# Altium PCB wacky-racer-car.PcbDoc (part 1 of 2)
Units mm, origin at the board's own origin, x right, y up, seen from the top; angles counter-clockwise.
Board outline 64 x 85 mm, 4 copper layers (Top Side, Ground Plane, Power Plane, Bottom Side), stack 0.844 mm thick; 102 components, 80 nets, 319 pads, 127 vias.
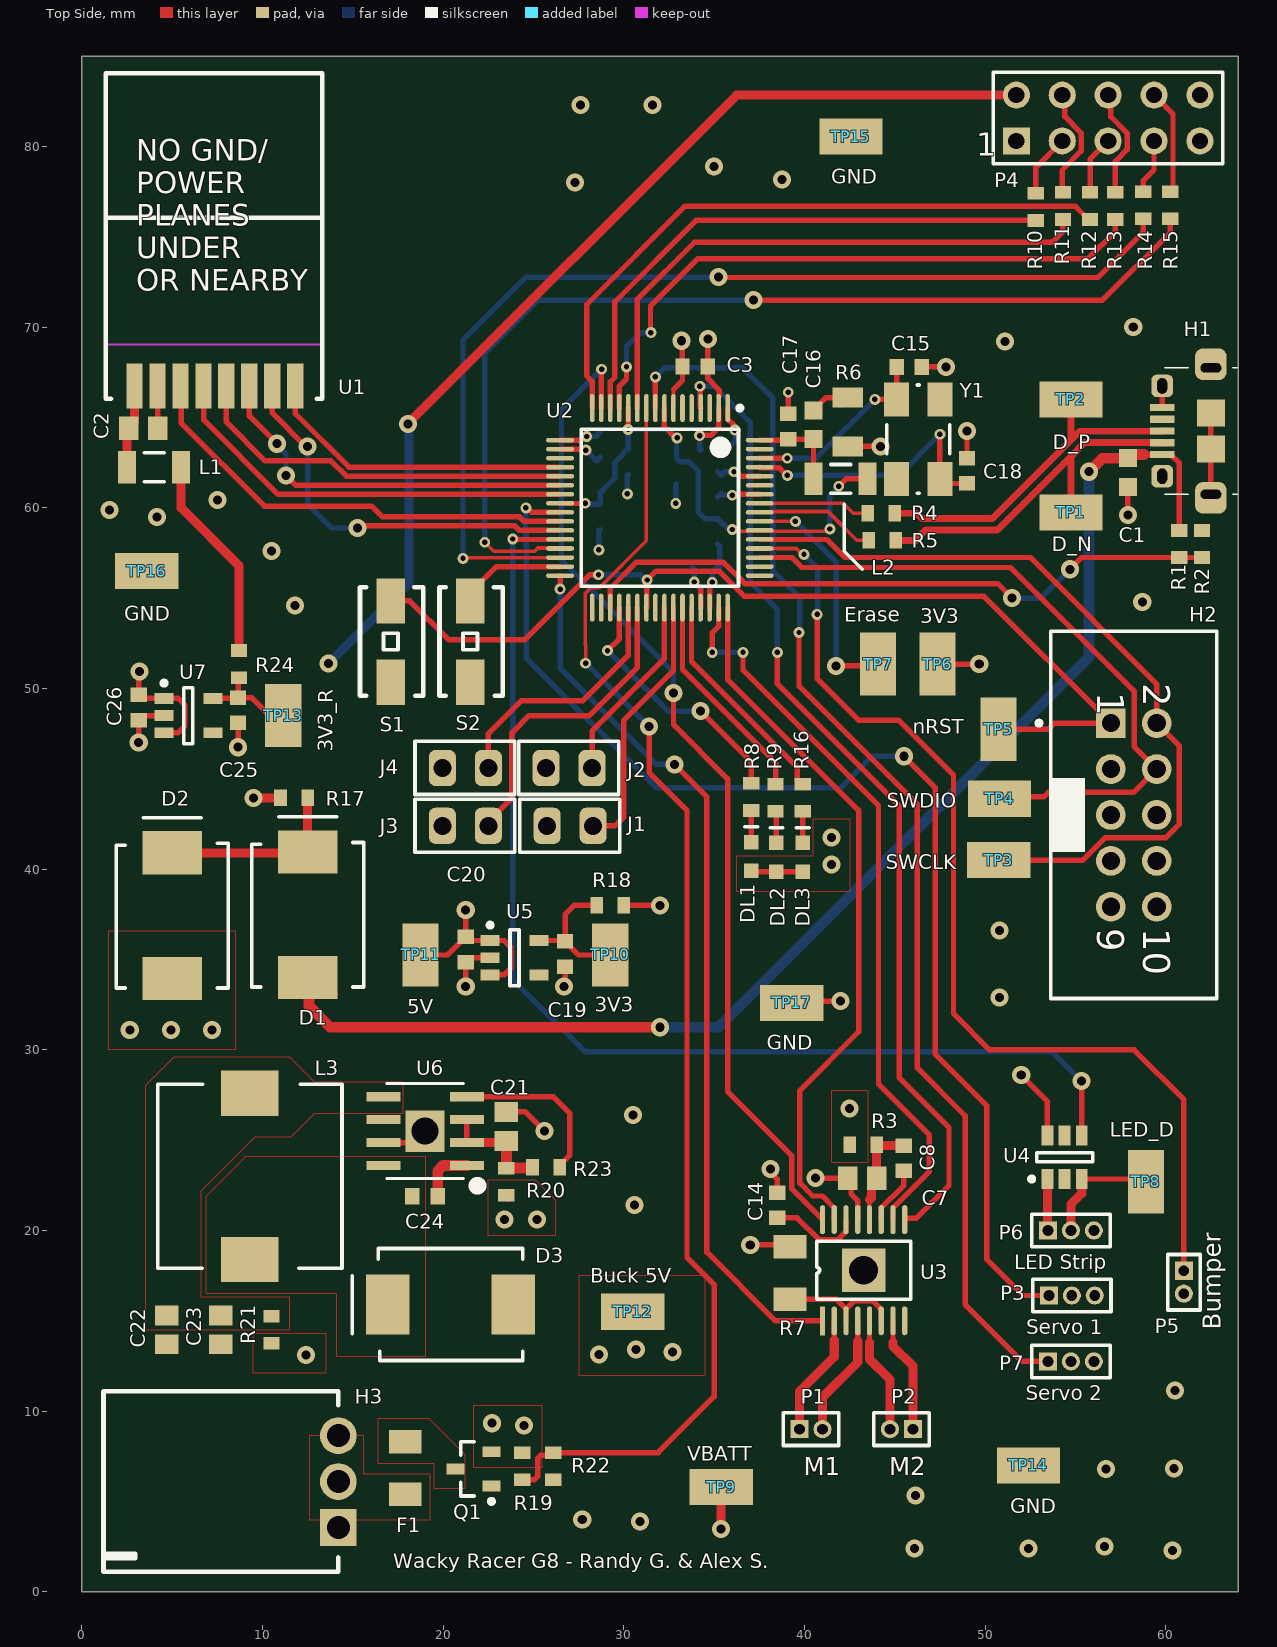
[diagram p0: Top Side view]
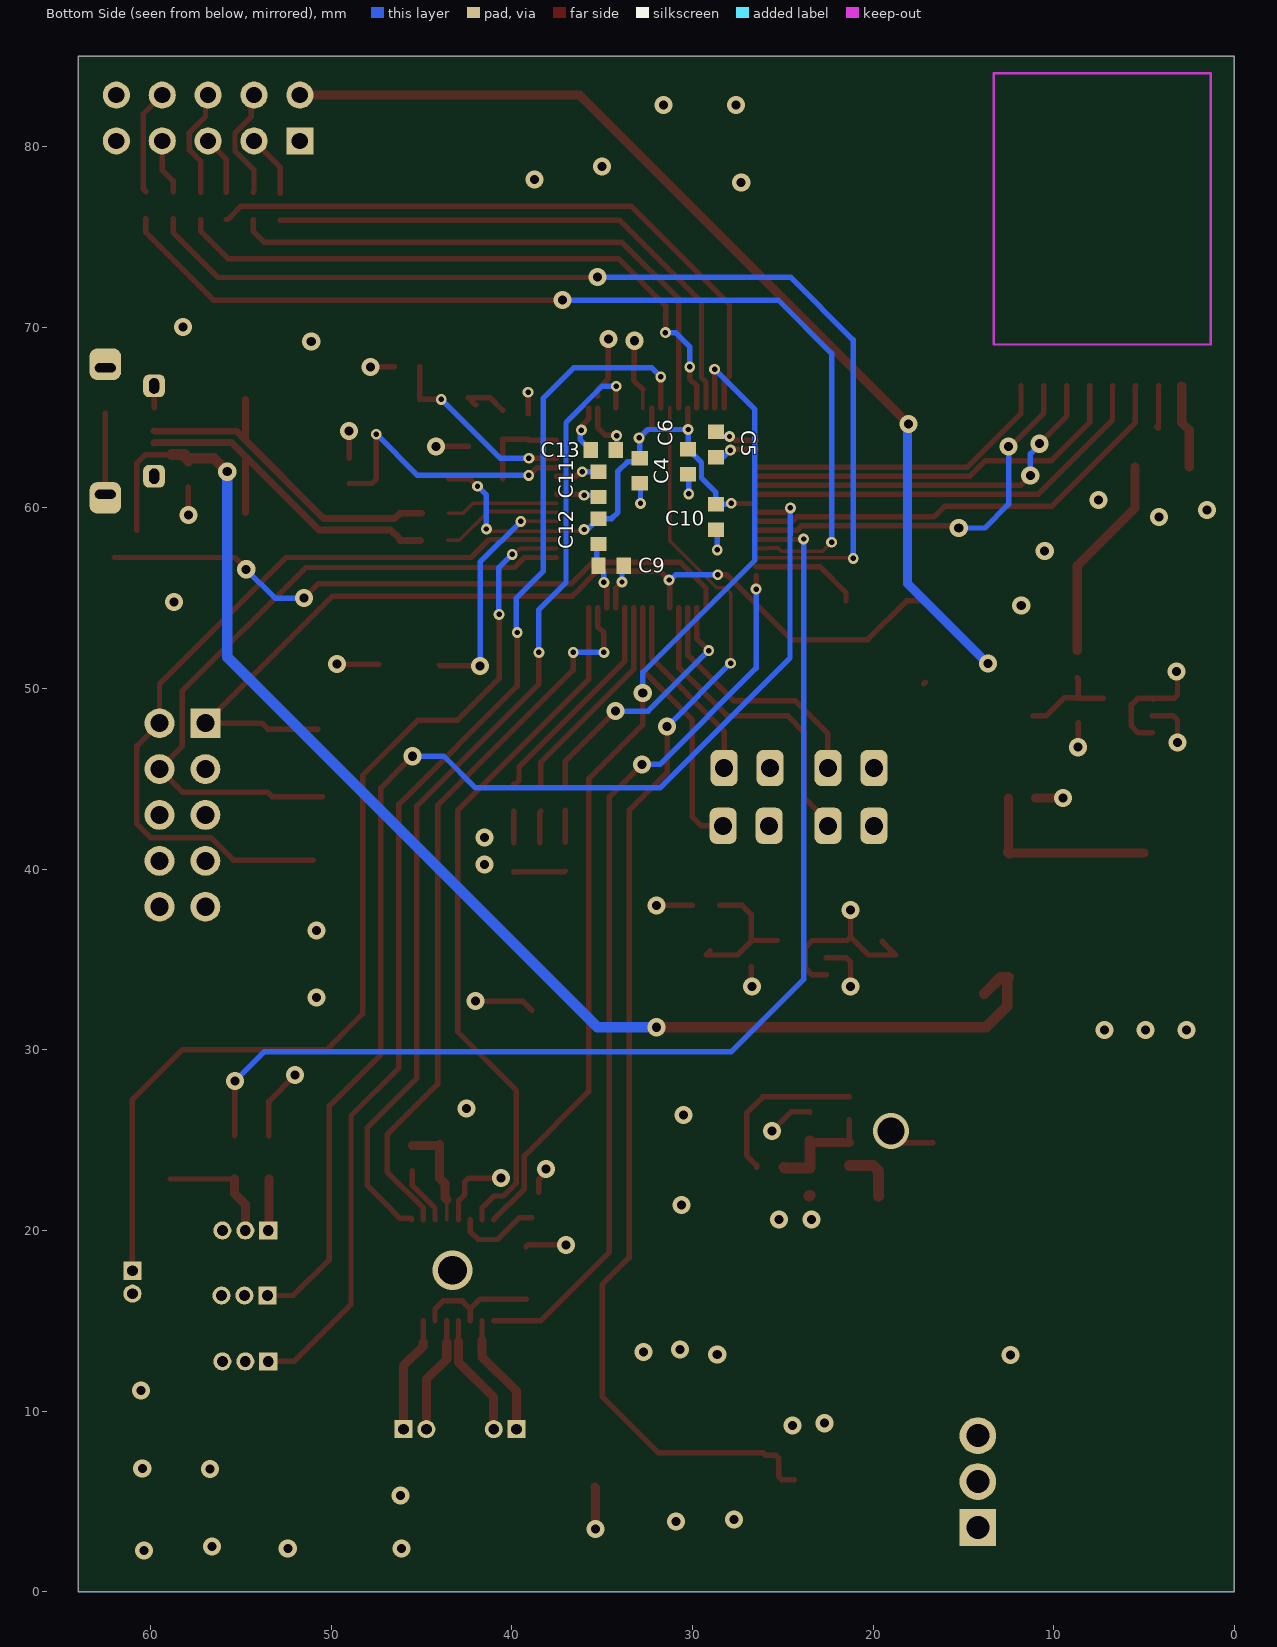
[diagram p1: Bottom Side view, seen from below]
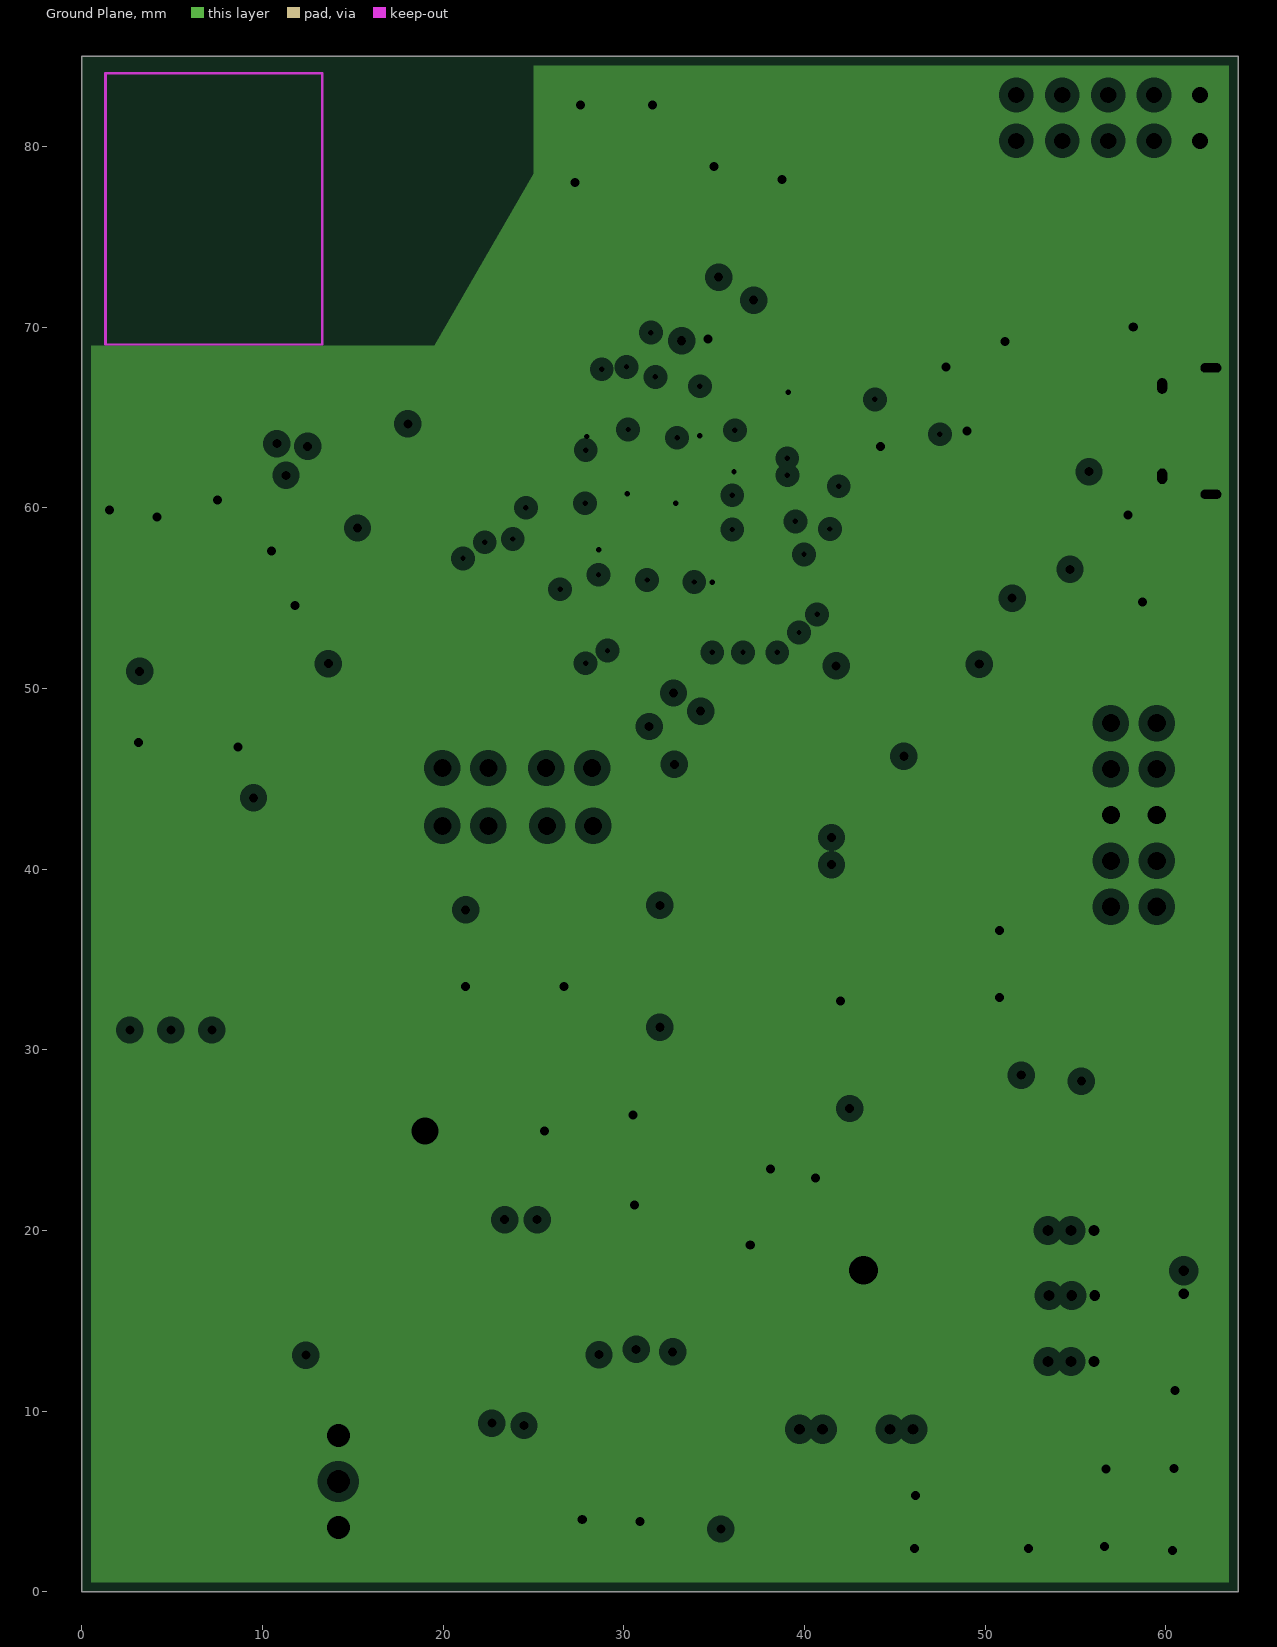
[diagram p2: Ground Plane, clearances drawn from the general rule]
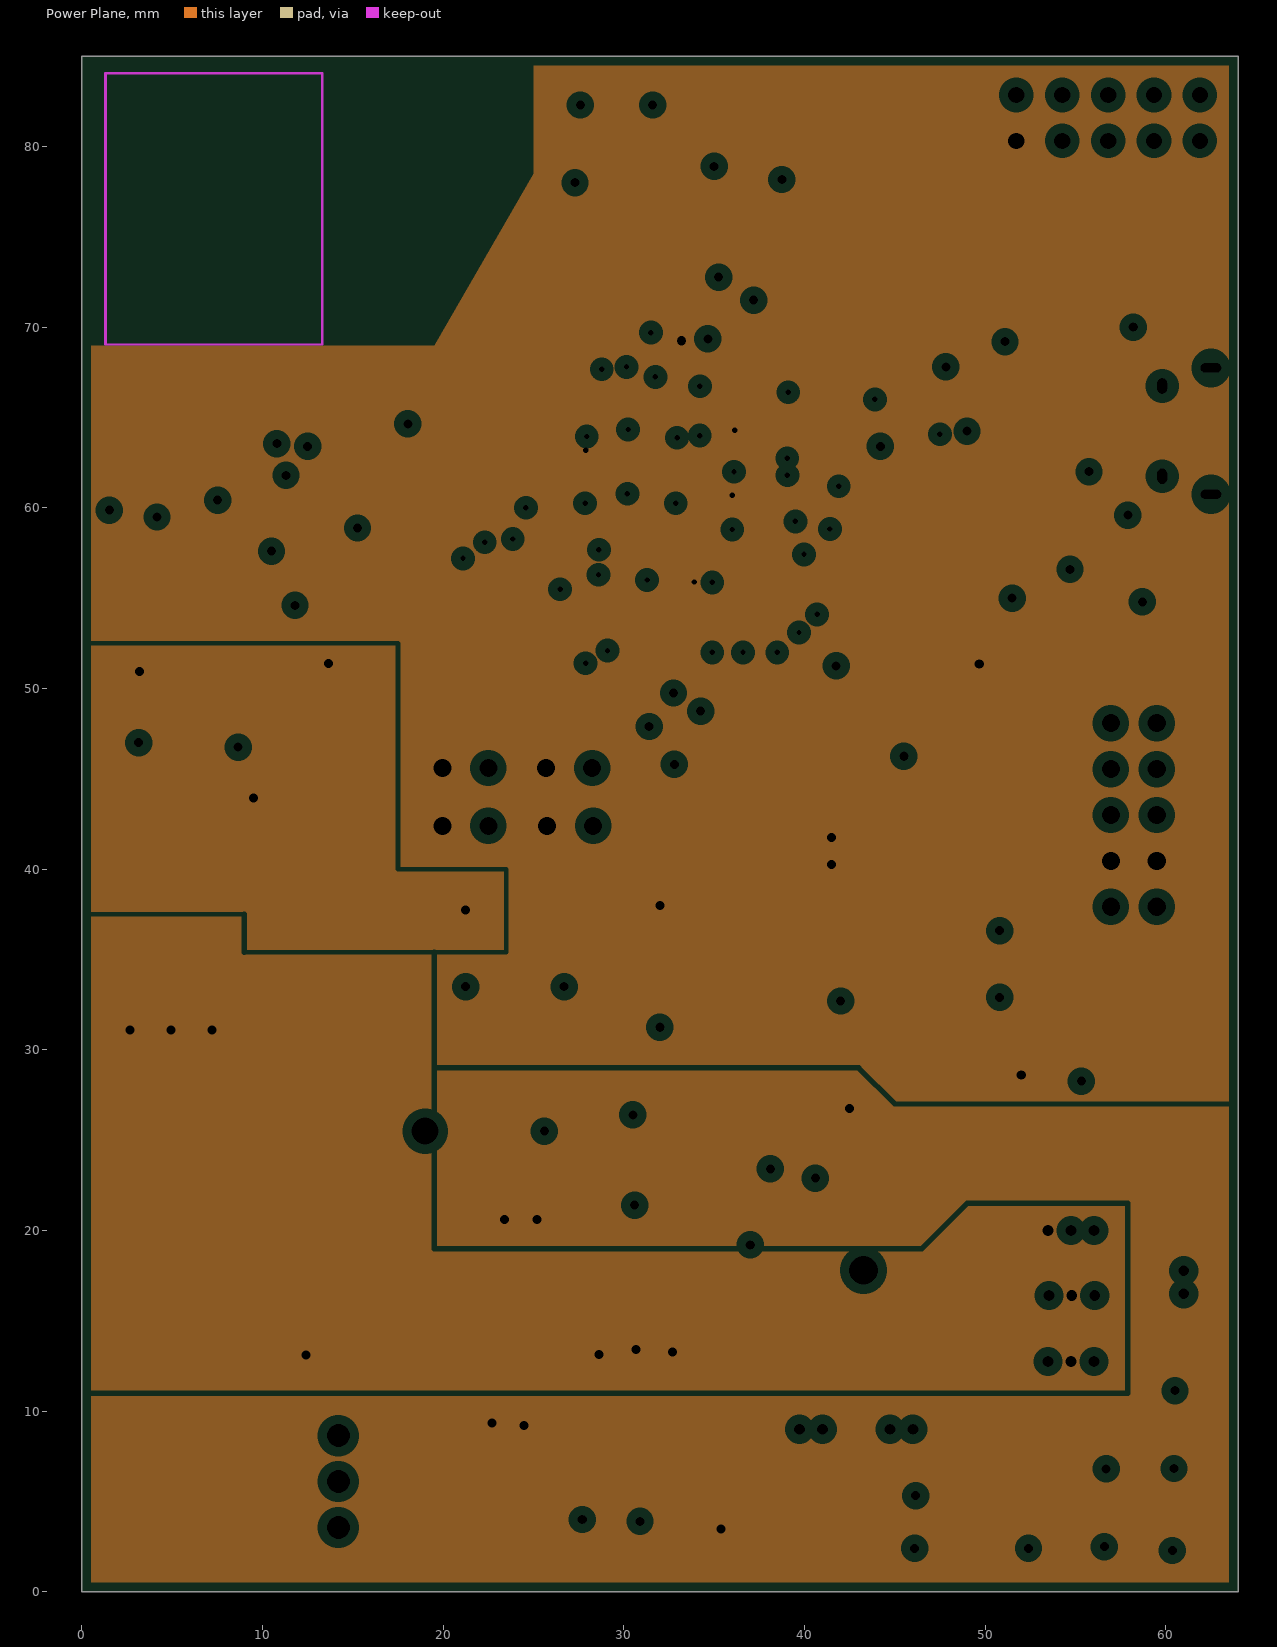
[diagram p3: Power Plane, clearances drawn from the general rule]

## Layer stack, top to bottom
Top Solder: solder mask 0.0102, Solder Resist, Dk 3.5
Top Side: signal copper 0.0356
Dielectric 1: core 0.32, FR-4, Dk 4.8
Ground Plane: plane copper 0.036, net GND
Dielectric 3: prepreg 0.127, Dk 4.2
Power Plane: plane copper 0.036, net (Multiple Nets)
Dielectric 4: core 0.254, Dk 4.2
Bottom Side: signal copper 0.0356
Bottom Solder: solder mask 0.0102, Solder Resist, Dk 3.5

## Board outline
0,85 64,85 64,0 0,0 0,85

## Design rules (kind name [scope] priority, off if disabled: settings)
BoardOutlineClearance [All] p1: gap=0.5 ignorepadtopadclearanceinfootprint=FALSE
Clearance Min_Clearance_Circuit_Labs [All] p1: gap=0.15 ignorepadtopadclearanceinfootprint=FALSE except(0: Arc-Hole Track-Hole SMDPad-Hole THPad-Hole Via-Hole Fill-Hole Poly-Hole Region-Hole Text-Hole)
DiffPairsRouting [All] p1: maxlimit=0.254 minlimit=0.254 mostfreqgap=0.254 toplayer_minwidth=0.381 toplayer_maxwidth=0.381 toplayer_prefwidth=0.381 bottomlayer_minwidth=0.381 bottomlayer_maxwidth=0.381 bottomlayer_prefwidth=0.381 maxuncoupledlength=12.7
FanoutControl Fanout_BGA [IsBGA] p1 off: bgadir=Out bgaviamode=Centered fanoutstyle=Auto fanoutdirection=Alternating viagrid=0.025 // Fanout_BGA (Default Rule)
HoleSize [All] p1: absolutevalues=TRUE maxlimit=10 minlimit=0.3 maxpercent=80.000 minpercent=20.000
MinimumAnnularRing [All] p1: minimumring=0.1
MinimumSolderMaskSliver [All] p1: minsoldermaskwidth=0.1
NetAntennae [All] p1: netantennaetolerance=1
PasteMaskExpansion [All] p1 off: expansion=0.2
PlaneClearance [All] p1: clearance=0.508
PlaneConnect [All] p1: planeconnectstyle=Relief reliefexpansion=0.508 reliefentries=4 reliefconductorwidth=0.254 reliefairgap=0.254
PolygonConnect [All] p1: connectstyle=Relief reliefconductorwidth=0.254 reliefentries=4 polygonreliefangle="90 Angle" airgapwidth=0.254
RoutingVias [All] p1: holewidth=0.5 width=1 viastyle="Through Hole" minholewidth=0.3 minwidth=0.6 maxholewidth=1 maxwidth=2
SMDNeckDown [All] p1 off: percent=50.000
SMDToCorner [All] p1: distance=98425
SMDToPlane [All] p1: distance=1968504
SilkToSolderMaskClearance SilkscreenOverComponentPads [IsPad] p1: minsilkscreentomaskgap=0.254 clearancetoexposedcopper=TRUE
SolderMaskExpansion [All] p1: expansion=0.102
ViasUnderSMD [All] p1: allowed=FALSE
Width [All] p1: maxlimit=2 minlimit=0.15 preferedwidth=0.3
21 further rules are at their usual default settings.

## Classes and differential pairs
component class "Power Management": C19 C20 C21 C22 C23 C24 C25 C26 D1 D2 D3 F1 H3 L3 Q1 R17 R18 R19 R20 R21 R22 R23 R24 TP9 TP10 TP11 TP12 TP13 TP14 TP15 TP16 TP17 U5 U6 U7
component class MCU: C1 C2 C3 C4 C5 C6 C7 C8 C9 C10 C11 C12 C13 C14 C15 C16 C17 C18 DL1 DL2 DL3 H1 H2 J1 J2 J3 J4 L1 L2 P1 P2 P3 P4 P5 P6 P7 R1 R2 R3 R4 R5 R6 R7 R8 R9 R10 R11 R12 R13 R14 R15 R16 S1 S2 TP1 TP2 TP3 TP4 TP5 TP6 TP7 TP8 U1 U2 U3 U4 Y1
differential pair D: +D_P -D_N

## Components (designator, comment, footprint, x,y, rotation, side; value= is the part's Value field where it differs from the comment)
C1 "4.7uF" CAPC1608N 57.9,61.95 r90 top
C2 "10uF" CAPC2012L 3.4,64.4 r180 top
C3 "100nF" CAPC1608L 33.95,67.825 r180 top
C4 "100nF" CAPC1608L 32.919,62.05 r270 bottom
C5 "100nF" CAPC1608L 28.7,63.5 r270 bottom
C6 "100nF" CAPC1608L 30.25,62.55 r270 bottom
C7 "10uF" CAPC2012L 43.2,22.9 r0 top
C8 "10nF" CAPC1608L 45.5,24 r90 top
C9 "100nF" CAPC1608L 34.5,56.8 r180 bottom
C10 "100nF" CAPC1608L 28.7,59.5 r270 bottom
C11 "100nF" CAPC1608L 35.2,61.3 r270 bottom
C12 "100nF" CAPC1608L 35.2,58.7 r270 bottom
C13 "100nF" CAPC1608L 34.933,63.196 r0 bottom
C14 "2.2uF" CAPC1608L 38.5,21.4 r90 top
C15 "27pF" CAPC1608L 45.8,67.8 r180 top
C16 "4.7uF" CAPC1608N 40.5,64.6 r270 top
C17 "100nF" CAPC1608L 39.1,64.5 r270 top
C18 "27pF" CAPC1608L 49,62.05 r270 top
C19 "1uF" CAPC1608L 26.75,35.3 r90 top
C20 "1uF" CAPC1608L 21.25,35.55 r90 top
C21 "10uF" CAPC2012L 23.5,25.75 r270 top
C22 "33uF" CAPC2012L 4.7,14.5 r90 top
C23 "33uF" CAPC2012L 7.7,14.5 r90 top
C24 "100nF" CAPC1608L 19,21.9 r180 top
C25 "1uF" CAPC1608L 8.65,48.8 r90 top
C26 "1uF" CAPC1608L 3.15,48.95 r90 top
D1 "VS-30BQ015-M3/9AT" SMC 12.5,37.475 r90 top
D2 "VS-30BQ015-M3/9AT" SMC 5,37.425 r90 top
D3 "VS-30BQ015-M3/9AT" SMC 20.4,15.9 r180 top
DL1 "Yellow" WL-SMCW0603 37.05,41.5 r270 top
DL2 "Blue" WL-SMCW0603 38.45,41.45 r270 top
DL3 "Red" WL-SMCW0603 39.9,41.45 r270 top
F1 "5A" RESC3216N 17.904,6.846 r90 top
H1 "JS_USB_MICRO_B" FCI_USB_10118194-0001LF 63.95,64.25 r90 top
H2 "Header 5X2 Vert" IDC2.54-V10D 58.23,43 r270 top
H3 "Battery In" BATT_HEADER_3POS 14.2,6.1 r90 top
J1 "100Mil Jumper" JMP2.54 28.3,42.4 r180 top
J2 "100Mil Jumper" JMP2.54 28.244,45.6 r180 top
J3 "100Mil Jumper" JMP2.54 22.5,42.4 r180 top
J4 "100Mil Jumper" JMP2.54 22.5,45.6 r180 top
L1 "1A max, Idc 0.3R," INDC3216L 4,62.25 r0 top
L2 "1A max, Idc 0.3R," INDC3216L 42,61.6 r0 top
L3 "IND 5.2UH 6A" INDUCTOR5u2 9.3,23 r90 top
P1 "Motor 1" MHDR1X2 39.73,9 r0 top
P2 "Motor 2" MHDR1X2 46,9 r180 top
P3 "Servo 1" MHDR1X3 53.53,16.4 r0 top
P4 "Header 5X2" HDR2X5 51.73,80.31 r0 top
P5 "Bumper" MHDR1X2 61,17.77 r270 top
P6 "LED Strip" MHDR1X3 53.48,20 r0 top
P7 "Servo 2" MHDR1X3 53.48,12.75 r0 top
Q1 "SSM3J328R,LF" SOT23_L 21.673,6.804 r180 top
R1 "27K" RESC1608L 60.75,58 r90 top
R2 "47K" RESC1608L 62,58 r270 top
R3 "0R" RESC1608L 43.25,24.75 r0 top
R4 "27R" RESC1608L 44.25,59.7 r180 top
R5 "27R" RESC1608L 44.3,58.2 r180 top
R6 "1R" RESC3216L 42.4,64.75 r90 top
R7 "25mR" RESC3216N 39.2,17.65 r270 top
R8 "1K" RESC1608L 37.05,44 r270 top
R9 "100R" RESC1608L 38.4,43.95 r270 top
R10 "750R" RESC1608L 52.81,76.66 r90 top
R11 "750R" RESC1608L 54.31,76.71 r270 top
R12 "750R" RESC1608L 55.81,76.71 r90 top
R13 "750R" RESC1608L 57.21,76.71 r270 top
R14 "750R" RESC1608L 58.75,76.75 r90 top
R15 "750R" RESC1608L 60.25,76.75 r270 top
R16 "1K" RESC1608L 39.9,43.95 r270 top
R17 "0R" RESC1608L 11.75,43.95 r0 top
R18 "0R" RESC1608L 29.25,38 r180 top
R19 "82K" RESC1608L 24.373,6.954 r90 top
R20 "0R" RESC1608L 23.5,22.7 r270 top
R21 "0R" RESC1608L 10.5,14.5 r90 top
R22 "47K" RESC1608L 26.1,6.95 r90 top
R23 "100K" RESC1608L 25.7,23.5 r0 top
R24 "0R" RESC1608L 8.7,51.35 r270 top
S1 "EVQPNF05M" EVQPNF05M 17.1,52.6 r270 top
S2 "EVQPNF05M" EVQPNF05M 21.5,52.6 r270 top
TP1 "D_N" TP_1206 54.75,59.75 r180 top value=TP
TP2 "D_P" TP_1206 54.75,66 r0 top value=TP
TP3 "SWCLK" TP_1206 50.75,40.5 r0 top value=TP
TP4 "SWDIO" TP_1206 50.8,43.9 r0 top value=TP
TP5 "nRST" TP_1206 50.75,47.75 r270 top value=TP
TP6 "3V3" TP_1206 47.375,51.35 r90 top value=TP
TP7 "Erase" TP_1206 44.075,51.35 r90 top value=TP
TP8 "LED_D" TP_1206 58.9,22.7 r90 top value=TP
TP9 "VBATT" TP_1206 35.4,5.8 r0 top value=TP
TP10 "3V3" TP_1206 29.25,35.25 r90 top value=TP
TP11 "5V" TP_1206 18.75,35.25 r90 top value=TP
TP12 "Buck 5V" TP_1206 30.5,15.5 r0 top value=TP
TP13 "3V3_R" TP_1206 11.15,48.5 r90 top value=TP
TP14 "GND" TP_1206 52.4,7 r0 top value=TP
TP15 "GND" TP_1206 42.575,80.55 r180 top value=TP
TP16 "GND" TP_1206 3.6,56.5 r0 top value=TP
TP17 "GND" TP_1206 39.3,32.6 r180 top value=TP
U1 "nRF24 SMD" NRF24 1.314,66.05 r0 top
U2 "ATSAM4S8BA-ANR" LQFP64_L 32,60 r270 top locked
U3 "DRV8833" HTSOP16 41,15 r90 top locked
U4 "SN74LVC1T45" SOT23-6_N 54.4,24.05 r90 top
U5 "CAT6219-330TDGT3" SOT95P280X145-5N 23.95,35.1 r0 top
U6 "ADP2302ARDZ-5.0 BUCK" RD_8_1 19,25.5 r180 top locked value=Value
U7 "CAT6219-330TDGT3" SOT95P280X145-5N 5.9,48.5 r0 top
Y1 "12MHz" 6.0X3.5-4 46.3,63.8 r90 top

## Footprints (in the part's own frame and the unit in brackets; to place one, negate y for a bottom-side part, rotate by r counter-clockwise, add the part's x,y. Pads: shape width x height; smd on the part's side, far side on the other; paste and mask are expansions set on the pad)
6.0X3.5-4 [mm] "4 SMD 6.0X3.5 mm No Lead Crystal"
  rect 1.9x1.4 smd: 1(-2.2,-1.2) 2(2.2,-1.2) 3(2.2,1.2) 4(-2.2,1.2)
  silkscreen extent -3,-1.75 3,1.75, body extent -3,-1.75 3,1.75, height 1.2
BATT_HEADER_3POS [mil]
  rect 80x80 hole 50: 1(-100,0)
  round 80 hole 50: 2(0,0) 3(100,0)
  silkscreen extent -197,0 197,512
CAPC1608L [mm] "Chip Capacitor, Body 1.6x0.8mm, IPC High Density"
  rect 0.8x0.9 smd: 1(-0.7,0) 2(0.7,0)
  body extent -0.87,-0.48 0.87,0.48, height 0.85
CAPC1608N [mm] "Chip Capacitor, Body 1.6x0.8mm, IPC Medium Density"
  rect 1x1 smd: 1(-0.8,0) 2(0.8,0)
  body extent -0.87,-0.48 0.87,0.48, height 0.85
CAPC2012L [mm] "Chip Capacitor, Body 2.0x1.3mm, IPC High Density"
  rect 1.1x1.3 smd: 1(-0.8,0) 2(0.8,0)
  body extent -1.1,-0.72 1.1,0.72, height 1.1
EVQPNF05M [mm] "Panansonic light touch SMD push button switch"
  rect 2.5x1.6 smd: 1(-2.25,0) 2(2.25,0)
  silkscreen extent -3,-1.7 3,1.8, body extent -3,-1.7 3,1.8, height 5
FCI_USB_10118194-0001LF [mm] "Micro USB B Type Receptacle"
  rect 0.4x1.35 smd mask+0.07: 1(-1.3,4.15) 2(-0.65,4.15) 3(0,4.15) 4(0.65,4.15) 5(1.3,4.15)
  rrect50% 1.75x1.75 hole 0.5 slot 1.15 at 90 deg copper offset -0.2,0 paste+0 mask+0.1: 6(-3.5,1.45)
  rrect50% 1.25x1.2 hole 0.55 slot 0.85 at 0 deg: 6(-2.5,4.15) 6(2.5,4.15)
  rect 1.5x1.55 smd: 6(-1,1.45) 6(1,1.45)
  rrect50% 1.75x1.75 hole 0.5 slot 1.15 at 90 deg copper offset 0.2,0 paste+0 mask+0.1: 6(3.5,1.45)
  silkscreen extent -3.5,0 3.5,4
HDR2X5 [mm] "Connector; Header; 5x2 Position"
  rect 1.5x1.5 hole 0.9: 1(0,0)
  round 1.5 hole 0.9: 2(0,2.54) 3(2.54,0) 4(2.54,2.54) 5(5.08,0) 6(5.08,2.54) 7(7.62,0) 8(7.62,2.54) 9(10.16,0) 10(10.16,2.54)
  silkscreen extent -1.27,-1.27 11.43,3.81
HTSOP16 [mm]
  rect 1.6x0.3 smd: 1(0,0)
  oval 1.6x0.3 smd: 2(0,-0.65) 3(0,-1.3) 4(0,-1.95) 5(0,-2.6) 6(0,-3.25) 7(0,-3.9) 8(0,-4.55) 9(5.6,-4.55) 10(5.6,-3.9) 11(5.6,-3.25) 12(5.6,-2.6) 13(5.6,-1.95) 14(5.6,-1.3) 15(5.6,-0.65) 16(5.6,0)
  rect 2.4x2.4 smd paste-0.5: 17(2.8,-2.275)
  silkscreen extent 1.2,-4.88 4.4,0.33
IDC2.54-V10D [mm] "Connector; IDC, Low Profile Male Header, Thru-Hole; 10 Position; Vertical; Pitch 2.54 mm; Body 20.32 x 9.2 x 9.45 mm (LxWxH)"
  rect 1.65x1.65 hole 1: 1(-5.08,-1.27)
  round 1.65 hole 1: 2(-5.08,1.27) 3(-2.54,-1.27) 4(-2.54,1.27) 5(0,-1.27) 6(0,1.27) 7(2.54,-1.27) 8(2.54,1.27) 9(5.08,-1.27) 10(5.08,1.27)
  silkscreen extent -10.16,-5.37 10.16,4.6, body extent -10.16,-4.6 10.16,4.6, height 9.45
INDC3216L [mm] "Chip Inductor, Body 3.2x1.6mm, IPC High Density"
  rect 1x1.8 smd: 1(-1.5,0) 2(1.5,0)
  silkscreen extent -0.55,-0.8 0.55,0.8, body extent -1.75,-0.95 1.75,0.95, height 1.9
INDUCTOR5u2 [mm]
  rect 2.5x3.2 smd: 1(-4.6,0) 2(4.6,0)
  silkscreen extent -5.1,-5.1 5.1,5.1
JMP2.54 [mm] "Jumper Change over 2.54mm"
  rrect50% 1.5x2 hole 1: 1(0,0) 2(2.544,0)
  silkscreen extent -1.47,-1.47 4.05,1.47, body extent -1.43,-1.43 4.05,1.43, height 8.45
LQFP64_L [mm] "Thin QFP, 64-Leads, Body 10x10mm, Pitch 0.5mm, IPC High Density"
  oval 1.55x0.25 smd mask+0.07: 1(-5.525,3.75) 2(-5.525,3.25) 3(-5.525,2.75) 4(-5.525,2.25) 5(-5.525,1.75) 6(-5.525,1.25) 7(-5.525,0.75) 8(-5.525,0.25) 9(-5.525,-0.25) 10(-5.525,-0.75) 11(-5.525,-1.25) 12(-5.525,-1.75) 13(-5.525,-2.25) 14(-5.525,-2.75) 15(-5.525,-3.25) 16(-5.525,-3.75) 33(5.525,-3.75) 34(5.525,-3.25) 35(5.525,-2.75) 36(5.525,-2.25) 37(5.525,-1.75) 38(5.525,-1.25) 39(5.525,-0.75) 40(5.525,-0.25) 41(5.525,0.25) 42(5.525,0.75) 43(5.525,1.25) 44(5.525,1.75) 45(5.525,2.25) 46(5.525,2.75) 47(5.525,3.25) 48(5.525,3.75)
  oval 0.25x1.55 smd mask+0.07: 17(-3.75,-5.525) 18(-3.25,-5.525) 19(-2.75,-5.525) 20(-2.25,-5.525) 21(-1.75,-5.525) 22(-1.25,-5.525) 23(-0.75,-5.525) 24(-0.25,-5.525) 25(0.25,-5.525) 26(0.75,-5.525) 27(1.25,-5.525) 28(1.75,-5.525) 29(2.25,-5.525) 30(2.75,-5.525) 31(3.25,-5.525) 32(3.75,-5.525) 49(3.75,5.525) 50(3.25,5.525) 51(2.75,5.525) 52(2.25,5.525) 53(1.75,5.525) 54(1.25,5.525) 55(0.75,5.525) 56(0.25,5.525) 57(-0.25,5.525) 58(-0.75,5.525) 59(-1.25,5.525) 60(-1.75,5.525) 61(-2.25,5.525) 62(-2.75,5.525) 63(-3.25,5.525) 64(-3.75,5.525)
  silkscreen extent -5.65,-4.35 4.35,4.55, body extent -5,-5 5,5, height 1.6
MHDR1X2 [mm] "Connector; Header; 2 Position"
  rect 1x1 hole 0.6: 1(0,0)
  round 1 hole 0.6: 2(1.27,0)
  silkscreen extent -0.9,-0.9 2.17,0.9
MHDR1X3 [mm] "Connector; Header; 3 Position"
  rect 1x1 hole 0.6: 1(0,0)
  round 1 hole 0.6: 2(1.27,0) 3(2.54,0)
  silkscreen extent -0.9,-0.9 3.44,0.9
NRF24 [mm]
  rect 0.9x2.5 smd: 1(1.6,0.7) 2(2.871,0.7) 3(4.143,0.7) 4(5.414,0.7) 5(6.686,0.7) 6(7.957,0.7) 7(9.229,0.7) 8(10.5,0.7)
  Keep-Out Layer lines w0.1: 0,3 12,3
  Keep-Out Layer lines w0.15: 0,3 0,18 12,18 12,3
  silkscreen extent 0,0 12,18
RD_8_1 [mil]
  rect 74x20 smd paste+0 mask+0: 1(-91,75) 2(-91,25) 3(-91,-25) 4(-91,-75) 5(91,-75) 6(91,-25) 7(91,25) 8(91,75)
  rect 84.65x90 smd paste-44.5 mask+0: EPAD(0,0)
  silkscreen extent -118,-104 84,123, body extent 0,0 10,10, height 10
RESC1608L [mm] "Chip Resistor, Body 1.6x0.8mm, IPC High Density"
  rect 0.7x0.9 smd: 1(-0.75,0) 2(0.75,0)
  body extent -0.85,-0.48 0.85,0.48, height 0.9
RESC3216L [mm] "Chip Resistor, Body 3.1x1.6mm, IPC High Density"
  rect 1.1x1.7 smd: 1(-1.35,0) 2(1.35,0)
  body extent -1.68,-0.87 1.68,0.87, height 2.54
RESC3216N [mm] "Chip Resistor, Body 3.2x1.6mm, IPC Medium Density"
  rect 1.3x1.8 smd: 1(-1.45,0) 2(1.45,0)
  body extent -1.68,-0.87 1.68,0.87, height 0.71
SMC [mm] "DO-214-AB/SMC; 2 C-Bend Leads; Body 7.9 x 5.9 mm, inc. leads (LxW)"
  rect 2.4x3.3 smd: 1(-3.475,0) 2(3.475,0)
  silkscreen extent -4,-3.1 5.43,3.1
SOT23-6_N [mm]
  rect 1.1x0.65 smd: 1(-1.2,0.95) 2(-1.2,0) 3(-1.2,-0.95) 4(1.2,-0.95) 5(1.2,0) 6(1.2,0.95)
  silkscreen extent -1.32,-1.55 0.25,1.95, body extent -0.9,-1.55 0.9,1.55, height 1.45
SOT23_L [mm] "SOT23, 3-Leads, Body 2.9x1.3mm, Pitch 0.95mm, Lead Span 2.3mm, IPC High Density"
  rect 1x0.6 smd: 1(-1,0.95) 2(-1,-0.95) 3(1,0)
  silkscreen extent -1.13,-1.5 0.7,1.92, body extent -0.7,-1.5 0.7,1.5, height 1.1
SOT95P280X145-5N [mm] "SOT23, 5-Leads, Body 2.90x2.80mm, Pitch 0.95mm, IPC Medium Density"
  rect 1.05x0.6 smd: 1(-1.35,0.95) 2(-1.35,0) 3(-1.35,-0.95) 4(1.35,-0.95) 5(1.35,0.95)
  silkscreen extent -1.47,-1.55 0.25,1.92, body extent -0.87,-1.52 0.87,1.53, height 1.45
TP_1206 [mm] "Test Point Pad"
  rect 3.5x2 smd: 1(0,0)
  body extent -1.62,-0.85 1.63,0.8, height 2
WL-SMCW0603 [mm] "2.4 x 0.8 x 0.7mm LED"
  rect 0.8x0.8 smd: 1(0,0) 2(1.6,0)
  silkscreen extent -0.85,-0.35 -0.85,0.35

## Part data
C1 C16: library part CC_4.7uF_0603, "CAP CER 4.7uF X5R +-20%  10V 0603", Max Voltage=10V, Code_IPC=2012[0805], Note="Footprint corresponds to dimensions for bulk cassette packaging. This case size has tightened tolerances.", PackageReference=0805, Storage Location="PCB Assembly WS", Supplier="ECE Dept"
C2 C7 C21: library part CC_10uF_16V_0805, "CAP CER 10uF X5R 16V 0805", Manufacturer="Samsung Electro-Mechanics", Manufacturer Part Number=CL21A106KOQNNWE, Max Voltage=16V, Operating Temperature="-55°C ~ 85°C", Package / Case="0805 (2012 Metric)", Ratings=-, Supplier Part Number 1=1276-2894-1-ND, Temperature Coefficient=X5R, Tolerance=±10%, Applications="General Purpose", Category=Capacitors, Code_IPC=2012[0805], ComponentLink1Description=http://www.samsungsem.com/kr/support/product-search/mlcc/CL21A106KOQNNWE.jsp, ComponentLink1URL=http://www.samsungsem.com/kr/support/product-search/mlcc/CL21A106KOQNNWE.jsp, Features=-, Height - Seated (Max)=-, Lead Spacing=-, Lead Style=-, Mounting Type="Surface Mount, MLCC", Note="Footprint corresponds to dimensions for bulk cassette packaging. This case size has tightened tolerances.", Notification="Current market demand for these product types have resulted in fluctuating and extending lead times. Lead times may differ.", PackageReference=0805, Packaging="Cut Tape (CT)", Part Status=Active, Pricing 1="1=0.35, 10=0.25, 100=0.1178, 500=0.08254, 1000=0.06831 (NZD)", RoHS="RoHS Compliant", Size / Dimension="0.079\" L x 0.049\" W (2.00mm x 1.25mm)", Stock 1=20000, Supplier 1=Digi-Key, Thickness (Max)="0.055\" (1.40mm)", Voltage - Rated=16V
C3 C4 C5 C6 C9 C10 C11 C12 C13 C17 C24: library part CC_100nF_0603, "CAP CER 100nF X7R +-10% 50V 0603", Code_IPC="1608 [0603]", PackageReference=0603, Storage Location="PCB Assembly WS", Supplier="ECE Dept"
C8: library part CC_10nF_0603, "CAP CER 10nF X7R +-10% 50V 0603", Code_IPC="1608 [0603]", PackageReference=0603, Storage Location="PCB Assembly WS", Supplier="ECE Dept"
C14: library part CC_2.2uF_0603, "CAP CER 2.2uF X5R +-20% 10V 0603", Max Voltage=10V, Code_IPC="1608 [0603]", PackageReference=0603, Storage Location="PCB Assembly WS", Supplier="ECE Dept"
C15 C18: library part CC_27pF_0603, "CAP CER 27pF NPO/COG +-5% 50V 0603", Code_IPC="1608 [0603]", PackageReference=0603, Storage Location="PCB Assembly WS", Supplier="ECE Dept"
C19 C20 C25 C26: library part CC_1uF_0603, "CAP CER 1uF Y5V -20% +80% 16V 0603", Max Voltage=16V, Code_IPC="1608 [0603]", PackageReference=0603, Storage Location="PCB Assembly WS", Supplier="ECE Dept"
C22 C23: library part CC_33uF_6V3_0805, "CAP CER 33uF X5R 6V3 0805", Manufacturer="TDK Corporation", Manufacturer Part Number=C2012X5R0J336M125AC, Operating Temperature="-55°C ~ 85°C", Package / Case="0805 (2012 Metric)", Ratings=-, Supplier Part Number 1=445-5986-1-ND, Temperature Coefficient=X5R, Tolerance=±20%, Voltage - Rated=6.3V, Applications="General Purpose", Category=Capacitors, ComponentLink1Description=https://product.tdk.com/info/en/catalog/datasheets/mlcc_commercial_general_en.pdf, ComponentLink1URL=https://product.tdk.com/info/en/catalog/datasheets/mlcc_commercial_general_en.pdf, Failure Rate=-, Features="Low ESL", Height - Seated (Max)=-, Lead Spacing=-, Lead Style=-, Mounting Type="Surface Mount, MLCC", Notification="Current market demand for these product types have resulted in fluctuating and extending lead times. Lead times may differ.", Packaging="Cut Tape (CT)", Part Status=Active, Pricing 1="1=1.65, 10=1.262, 100=0.9023, 500=0.6985, 1000=0.60149 (NZD)", RoHS="RoHS Compliant", Size / Dimension="0.079\" L x 0.049\" W (2.00mm x 1.25mm)", Stock 1=20000, Supplier 1=Digi-Key, Thickness (Max)="0.057\" (1.45mm)"
D1 D2 D3: library part DS_VS-30BQ015-M3, "DIODE, SCHOTTKY, 3A, 15V, DO-214AB / SMC", Average Rectified Current=3A, Forward Voltage=350mV, Manufacturer="Vishay Semiconductors", Max Forward Surge Current (Ifsm)=650A, Max Reverse Voltage (DC)=15V, Peak Reverse Current=4mA, Supplier Part Number=VS-30BQ015-M3/9AT-ND, Supplier Part Number 1=VS-30BQ015-M3/9ATGIDKR-ND, ComponentLink1Description=https://datasheet.ciiva.com/36181/vs-30bq015-m3-9at-36181258.pdf, ComponentLink1URL=https://datasheet.ciiva.com/36181/vs-30bq015-m3-9at-36181258.pdf, Manufacturer Part Number=VS-30BQ015-M3/9AT, Supplier=Digi-Key, Supplier 1=Digi-Key, Supplier 2=Element14, Supplier Part Number 2=2628288
DL1: library part DL_150060YS75000, "LED Yellow 120mcd 0603 SMD", Forward Current If=30, Forward Voltage=2, Manufacturer="WURTH ELEKTRONIK", Manufacturer Part Number=150060YS75000, Supplier Part Number 1=2322074, LED Colour=Yellow, LED Mounting=SMD, Lens Shape=Rectangular, Luminous Intensity=120, Storage Location="PCB Assembly WS", Supplier="ECE Dept", Supplier 1=Farnell, Viewing Angle=140°, Wavelength Typ=590
DL2: library part DL_150060BS75000, "LED Blue 270mcd 0603 SMD", Forward Current If=30, Forward Voltage=3.2, Manufacturer="WURTH ELEKTRONIK", Manufacturer Part Number=150060BS75000, Supplier Part Number 1=2322069, LED Colour=Blue, Luminous Intensity=270, Pricing="1=0.3844, 50=0.3252, 100=0.2957, 500=0.2365 (NZD)", Storage Location="PCB Assembly WS", Supplier="ECE Dept", Supplier 1=Farnell, Viewing Angle=120°, Wavelength Typ=470
DL3: library part DL_150060RS75000, "LED Red 250mcd 0603 SMD", Forward Current If=30, Forward Voltage=2, Manufacturer="WURTH ELEKTRONIK", Manufacturer Part Number=150060RS75000, Supplier Part Number 1=2322071, LED Colour=Red, LED Mounting=SMD, Lens Shape=Rectangular, Luminous Intensity=250, Storage Location="PCB Assembly WS", Supplier="ECE Dept", Supplier 1=Farnell, Viewing Angle=140°, Wavelength Typ=625
F1: library part FS_Fuse_5.0A, "Fuse 5.0A Fast Acting 1206 SMD", Case/Package=1206, Case Code (Metric)=3216, DC Cold Resistance=19mR, Manufacturer="Bel TRP", Manufacturer Part Number=C1F5, Max Operating Temperature=125°C, Min Operating Temperature=-55°C, Supplier Part Number 1=507-1886-1-ND, Voltage Rating=125V, Voltage Rating (DC)=63V, Approvals=CE,cURus, Case Code (Imperial)=1206, ComponentLink1Description=http://www.farnell.com/datasheets/2571625.pdf, ComponentLink1URL=http://www.farnell.com/datasheets/2571625.pdf, ComponentLink2Description=http://belfuse.com/pdfs/C1F.pdf, ComponentLink2URL=http://belfuse.com/pdfs/C1F.pdf, ComponentLink3Description=http://www.mouser.com/ds/2/643/C1F-594910.pdf, ComponentLink3URL=http://www.mouser.com/ds/2/643/C1F-594910.pdf, ComponentLink4Description=https://belfuse.com/resources/StewartConnector/C1F.pdf, ComponentLink4URL=https://belfuse.com/resources/StewartConnector/C1F.pdf, Contact Plating=Nickel,Tin, Current Rating=5A, Fuse Type="Board Mount (Cartridge Style Excluded)", Length=0.126inch, Mount="Surface Mount", Number of Pins=2, Packaging="Tape and Reel", Pricing 1="1=0.32, 5=0.312, 10=0.298, 50=0.2662, 100=0.2479, 250=0.22032, 500=0.1836, 1000=0.17442 (USD)", Stock 1=725, Supplier 1=Digi-Key, Supplier 2=Element14, Supplier Part Number 2=2848595, Voltage Rating (AC)=125V, Width=0.062inch
H1: library part JS_USB_MICRO_B_SMT, "CONN USB MICRO B RECPT SMT R/A", Manufacturer=FCI, Manufacturer Part Number=10118194-0001LF, Supplier Part Number 1=609-4618-1-ND, Features="Shielded, Solder Retention", Gender=Receptacle, Mounting Type="Surface Mount, Right Angle, Horizontal", Number of Contacts=5, Specifications="USB 2.0", Supplier 1=Digi-Key
H2: library part JA_HDR_IDC_5X2_VERT, "IDC Header, 2,54mm, 10-Pin, Vert", Supplier Part Number 1=1096985, Storage Location="ECE Dept Store", Supplier="ECE Dept", Supplier 1=Farnell
H3: library part Battery_HEADER_3pin, "3Pin Header 2.54mm spacing"
J1 J2 J3 J4: library part TP_JUMPER, "2.54mm Jumper Thru Hole", Supplier Part Number 1=1097975, No. of Positions=2, No. of Rows=1, Pitch Spacing=2.54, Storage Location="ECE$ Store", Supplier="ECE Dept", Supplier 1=Farnell
L1 L2: library part IN_Ferrite-Bead, "Ferrite Bead, Rdc 0.3R, Z100MHZ 600R, Imax 1A, SMD 1206", DC Current Rating=1, DC Resistance Max=0.08, Ferrite Case Style="1206 ^3216 Metric]", Frequency Range="50MHz to 1", Impedance Tolerance="± 25%", Manufacturer=FAIR-RITE, Manufacturer Part Number=2512066017Y1, Supplier Part Number 1=1612060, Ferrite Mounting=SMD, Impedance=600, Manufacturer PN=2512066017Y1, Storage Location="PCB Assembly WS", Supplier="ECE Dept", Supplier 1=Farnell
L3: library part CDRH104RNP-5R2NC, "FIXED IND 5.2UH 6A 22 MOHM SMD", Current - Saturation=5.6A, DC Resistance (DCR)="22 mOhm Max", Frequency - Self Resonant=-, Manufacturer="Sumida America Components Inc.", Operating Temperature="-40°C ~ 100°C", Package / Case=Nonstandard, Supplier Part Number 1=308-2280-1-ND, Tolerance=±30%, Category="Inductors, Coils, Chokes", ComponentLink1Description=http://products.sumida.com/products/pdf/CDRH104R.pdf, ComponentLink1URL=http://products.sumida.com/products/pdf/CDRH104R.pdf, Height - Seated (Max)="0.157\" (4.00mm)", Manufacturer Part Number=CDRH104RNP-5R2NC, Material - Core=Ferrite, Mounting Type="Surface Mount", Packaging="Cut Tape (CT)", Part Status=Active, Pricing 1="1=2.9, 10=2.678, 100=1.8743, 500=1.5173 (NZD)", Q @ Freq=-, Ratings=-, RoHS="RoHS Compliant", Shielding=Shielded, Size / Dimension="0.402\" L x 0.394\" W (10.20mm x 10.00mm)", Stock 1=3849, Supplier 1=Digi-Key, Supplier Device Package=-, Type=-
P1 P2 P5: library part MHDR1X2, "Header, 2-Pin", LatestRevisionDate=17-Jul-2002, LatestRevisionNote="Re-released for DXP Platform.", Publisher="Altium Limited"
P3 P6 P7: library part MHDR1X3, "Header, 3-Pin", LatestRevisionDate=17-Jul-2002, LatestRevisionNote="Re-released for DXP Platform.", Publisher="Altium Limited"
P4: "Header, 5-Pin, Dual row", LatestRevisionDate=17-Jul-2002, LatestRevisionNote="Re-released for DXP Platform.", Publisher="Altium Limited"
Q1: library part TM_SSM3J328R, "MOSFET P-CH 20V 6A SOT23-3", Case/Package=SOT-23-3, Continuous Drain Current (ID)=6A, Drain to Source Breakdown Voltage=-20V, Drain to Source Resistance=47.4mR, Drain to Source Voltage (Vdss)=20V, Gate to Source Voltage (Vgs)=8V, Input Capacitance=840pF, Input Capacitance (Ciss) @ Vds="840pF @ 10V", Manufacturer=Toshiba, Max Operating Temperature=150°C, Max Power Dissipation=1W, Min Operating Temperature=-55°C, Package / Case="SOT-23-3 Flat Leads", Package Quantity=3000, Power Dissipation=2W, Supplier Device Package=SOT-23F, Supplier Part Number=SSM3J328RLFDKR-ND, ComponentLink1Description=https://datasheet.ciiva.com/11158/ssm3j328r-datasheet-en-20140301-11158652.pdf, ComponentLink1URL=https://datasheet.ciiva.com/11158/ssm3j328r-datasheet-en-20140301-11158652.pdf, Current - Continuous Drain (Id) @ 25° C=6A, Element Configuration=Single, FET Feature="Logic Level Gate, 1.5V Drive", FET Type="MOSFET P-Channel, Metal Oxide", Gate Charge (Qg) @ Vgs="12.8nC @ 4.5V", Manufacturer Part Number=SSM3J328R,LF, Mount="Surface Mount", Number of Channels=1, Number of Elements=1, Number of Pins=3, Packaging="Tape and Reel", Power - Max=1W, Pricing="1=0.79, 10=0.658, 25=0.5772, 100=0.4939, 250=0.42836, 500=0.36284, 1000=0.27972 (NZD)", Radiation Hardening=No, Rds On Max=29.8mR, Storage Location="PCB Assembly WS", Supplier=Digi-Key, Supplier 1=Digi-Key, Supplier Part Number 1=SSM3J328RLFDKR-ND, Turn-Off Delay Time=107ns, Turn-On Delay Time=32ns, Vgs(th) (Max) @ Id="1V @ 1mA"
R1 R2: library part RS_27K, "RES 27K OHM 1/10W 5% 0603 SMD", Storage Location="PCB Assembly WS", Supplier="ECE Dept"
R3 R17 R18 R20 R21 R24: library part RS_0R0, "RES 0.0 OHM 1/10W 5% 0603 SMD", Storage Location="PCB Assembly WS", Supplier="ECE Dept"
R4 R5: library part RS_27R, "RES 27 OHM 1/10W 5% 0603 SMD", Storage Location="PCB Assembly WS", Supplier="ECE Dept"
R6: library part RT_1R, "RES 1R OHM 1/4W 5% 1206 SMD", Storage Location="PCB Assembly WS", Supplier="ECE Dept"
R7: library part RS_25mR, "0.5W 1206 25mR Resistor", Power=0.5W
R8 R16: library part RS_1K, "RES 1.0K OHM 1/10W 5% 0603 SMD", Storage Location="PCB Assembly WS", Supplier="ECE Dept"
R9: library part RS_100R, "RES 100 OHM 1/10W 5% 0603 SMD", Storage Location="PCB Assembly WS", Supplier="ECE Dept"
R10 R11 R12 R13 R14 R15: library part RS_750R, "RES 750 OHM 1/10W 5% 0603 SMD", Storage Location="PCB Assembly WS", Supplier="ECE Dept"
R19: library part RS_82K, "RES 82.0K OHM 1/10W 5% 0603 SMD", Storage Location="PCB Assembly WS", Supplier="ECE Dept"
R22: library part RS_47K, "RES 47.0K OHM 1/10W 5% 0603 SMD", Storage Location="PCB Assembly WS", Supplier="ECE Dept"
R23: library part RS_100K, "RES 100K OHM 1/10W 5% 0603 SMD", Storage Location="PCB Assembly WS", Supplier="ECE Dept"
S1 S2: library part WS_EVQPNF05M, "Panasonic 6 x 3.5mm SMD Light Touch Switch Type SMD", Manufacturer=Panasonic, Supplier Part Number 1=2079481, Manufacturer PN=EVQPNF05M, PackageDescription="6.0 x 3.5 mm", Storage Location="PCB Assembly WS", Supplier="ECE Dept", Supplier 1=Farnell, Supplier 2=Digi-Key, Supplier Part Number 2=P13598SCT-ND
TP1 TP2 TP3 TP4 TP5 TP6 TP7 TP8 TP9 TP10 TP11 TP12 TP13 TP14 TP15 TP16 TP17: library part TP_1206, "Test-Point 3.3x1.6x2.1mm SMD", Manufacturer="Harwin Inc", Manufacturer Part Number=S1751-46R, Supplier Part Number 1=952-1478-2-ND, Mounting Type="Surface Mount", Storage Location=ProtoPlace, Supplier="ECE Dept", Supplier 1=Digi-Key, Supplier 2=Farnell, Supplier Part Number 2=1826282, Type="PC Test Point"
U1: library part NRF24, "nRF24 SMD Module", Warning="No power planes near or under device"
U2: library part SE_ATSAM4S16BA-MU, "IC MCU 32BIT 512KB FLASH 64LQFP", Manufacturer=Atmel, Package / Case=64-LQFP, Supplier Part Number 1=ATSAM4S8BA-ANRCT-ND, Voltage - Supply (Vcc/Vdd)="1.62 V ~ 3.6 V", Code_JEDEC=MO-220VMMD-3, ComponentLink1Description="Manufacturer URL", ComponentLink1URL=http://www.atmel.com/, ComponentLink2Description="SAM4S Series Datasheet", ComponentLink2URL=http://www.atmel.com/dyn/resources/prod_documents/11100.pdf, ComponentLink3Description="SAM4S Series Summary", ComponentLink3URL=http://www.atmel.com/dyn/resources/prod_documents/11100S.pdf, Connectivity="I²C, IrDA, Memory Card, SPI, SSC, UART/USART, USB", Core Processor="ARM® Cortex®-M4", Core Size=32-Bit, Data Converters="A/D 11x12b, D/A 2x12b", Manufacturer Part Number=ATSAM4S8BA-ANR, Number of I/O=47, PackageDescription="64-Pin Quad Flat No-Lead (QFN) Sawn, 9 x 9 x 1.0 mm Body, 0.5 mm Pitch, Exposed Pad", PackageReference=64PS, PackageVersion="revJ, Jul-2007", Packaging="Cut Tape (CT)", Peripherals="Brown-out Detect/Reset, DMA, POR, PWM, WDT", Program Memory Size="512KB (512K x 8)", Program Memory Type=FLASH, RAM Size="128K x 8", Speed=120MHz, Supplier 1=Digi-Key
U3: "Dual H-Bridge Motor Driver 1.5A"
U4: "1.8V - 5V level converter"
U5 U7: library part SV_CAT6219-330TDGT3, "IC REG LIN 3.3V 500MA TSOT23-5", Base Part Number=CAT6219, Current - Output=500mA, Package / Case="SOT-23-5 Thin, TSOT-23-5", Supplier Device Package=TSOT-23-5, Supplier Part Number=CAT6219-330TDGT3CT-ND, Voltage - Input (Max)=5.5V, Voltage - Output (Min/Fixed)=3.3V, Voltage Dropout (Max)="0.5V @ 500mA", ComponentLink1Description=http://www.onsemi.com/pub/Collateral/CAT6219-D.PDF, ComponentLink1URL=http://www.onsemi.com/pub/Collateral/CAT6219-D.PDF, Manufacturer Part Number=CAT6219-330TDGT3, Supplier=Digi-Key, Supplier 1=Digi-Key
U6: library part ADP2302ARDZ-5.0-R7, "IC REG BUCK 5V 2A 8SOIC", Current - Output=2A, Frequency - Switching=700kHz, Supplier Part Number 1=ADP2302ARDZ-5.0-R7CT-ND, Voltage - Input (Max)=20V, Voltage - Output (Min/Fixed)=5V, Manufacturer_Part_Number=ADP2302ARDZ-5.0-R7, Output Type=Fixed, Supplier 1=Digi-Key, Type=DEV, Vendor="Analog Devices Inc"
Y1: library part XT_CRYSTAL_12MHz_18pF, "CRYSTAL 12MHZ 18PF 6X3.5mm SMD", ESR (Equivalent Series Resistance)="60 Ohm", Frequency Stability=±50ppm, Frequency Tolerance=±30ppm, Load Capacitance=18pF, Manufacturer="CTS-Frequency Controls", Manufacturer Part Number=406C35D12M00000, Operating Mode=Fundamental, Operating Temperature="-20°C ~ 70°C", Package / Case="4-SMD, No Lead (DFN, LCC)", Supplier Part Number 1=CTX855CT-ND, Frequency=12MHz, Height="0.047\" (1.20mm)", Mounting Type="Surface Mount", Size / Dimension="0.236\" L x 0.138\" W (6.00mm x 3.50mm)", Supplier 1=Digi-Key

## Via types
v1: diameter 1, hole 0.5, Top Side to Bottom Side, 82 vias
v2: diameter 0.6, hole 0.3, Top Side to Bottom Side, 43 vias
v3: diameter 2.2, hole 1.6, Top Side to Bottom Side, 1 vias
v4: diameter 2, hole 1.5, Top Side to Bottom Side, 1 vias

## Nets (pads, with @x,y where several pads share a name; then routed paths per layer and width w, separated by ;. In a path a pad name is that pad's centre, name@x,y a point inside that pad or via, vN(x,y) a via of type N, cw(c..) or ccw(c..) an arc to the next point about the centre after c; other vN are vias at no path point)
3V3: C3.2 C5.2 C9.2 C11.2 C13.2 DL1.2 DL2.2 DL3.2 H2.7 H2.8 J1.2 J2.2 J3.2 J4.2 P4.1 R18.1 TP6.1 U2.1 U2.7 U2.18 U2.45 U2.58 U4.6 | length 25.2
  Top Side w0.2: U2.7 32.75,66.55
  Top Side w0.3: U2.18 26.485,63.24 27.859,63.24 v2(27.9,63.2) ; R18.1 v1(32,38) ; 32.75,66.55 33.25,67.05 C3.2 33.225,67.85 33.225,69.225 v1(33.2,69.25) ; v2@34,55.794 34.25,55.544 U2.45 ; U2.1 35.75,64.925 36.093,64.582 36.093,64.357 v2(36.15,64.3) ; v2(36,60.7) 36.05,60.75 U2.58 ; DL1.2 37.1,39.85 DL2.2 DL3.2 DL3.2@39.868,39.818 ; TP6.1 v1(49.675,51.35) ; v1(52,28.6) 53.45,27.15 U4.6
  Bottom Side w0.3: v2(27.9,63.2) 28.5,62.6 C5.2 ; C9.2@33.8,56.7 33.9,56.6 v2(33.9,55.894) ; C11.2 35.4,60.8 35.5,60.7 v2(36,60.7) ; C13.2 36.2,63.763 36.2,64.25 v2(36.15,64.3)
  other v1: 41.5,40.25 41.5,41.75
3V3_Radio: L1.2 R24.1 | length 11.5
  Top Side w0.5: L1.2 5.5,60 8.7,56.8 R24.1
5V: C20.2 C26.2 P4.2 R17.1 TP11.1 U5.1 U5.3 U7.1 U7.3 | length 75.4
  Top Side w0.3: v1(3.2,50.95) 3.15,50.9 C26.2 3.35,49.45 U7.1 ; U7.1@4.5,49.4 U7.1 5.349,49.451 5.7,49.1 5.7,47.925 5.325,47.55 U7.3 ; TP11.1@19.5,36 TP11.1 20.25,35.25 C20.2 ; v1(21.25,37.75) C20.2 ; U5.3 23.375,34.15 23.75,34.525 23.75,35.675 23.375,36.05 U5.1 21.45,36.05 C20.2
  Top Side w0.5: v1(9.5,43.95) R17.1 ; v1(18.05,64.65) 36.25,82.85 P4.2
  Bottom Side w0.3: v1(21.25,37.75) v1@21.439,37.75
  Bottom Side w0.5: v1(13.65,51.375) 18.1,55.825 18.1,64.6 v1(18.05,64.65)
5V_BUCK: D2.1 P3.2 P6.1 P7.2 R21.1 TP12.1 U4.1 | length 2.9
  Top Side w0.5: U4.1 53.45,20.03 P6.1
  other v1: 12.4,13.1 28.627,13.127 32.7,13.279 30.684,13.416 2.654,31.1 4.927,31.1 7.2,31.1
BUMPER_SENSE: P5.1 U2.52 | length 56.9
  Top Side w0.2: U2.52 39.542,57.75 39.867,57.425 v2(39.975,57.425)
  Top Side w0.3: v2(40.7,54.1) 40.7,50.55 43,48.25 45.2,48.25 48.25,45.2 48.25,32 50.25,30 58.25,30 61,27.25 P5.1
  Bottom Side w0.3: v2(39.975,57.425) 40.725,56.675 40.725,54.125 v2(40.7,54.1)
CE_RF24: U1.3 U2.26 | length 25.3
  Top Side w0.3: U1.3 5.5,66.707 5.5,64.7 10.1,60.1 16.031,60.1 16.631,59.5 24.235,59.5 24.485,59.25 U2.26
CH1_RF24: J1.1 U2.42 | length 14.6
  Top Side w0.3: J1.1 29.5,42.4 30,42.9 30,48.25 32.75,51 U2.42
CH2_RF24: J2.1 U2.41 | length 10.5
  Top Side w0.3: J2.1 28.244,47.644 32.25,51.65 U2.41
CH3_RF24: J3.1 U2.38 | length 17.5
  Top Side w0.3: J3.1 22.5,42.65 23.8,43.95 23.8,47.55 24.75,48.5 28.1,48.5 30.75,51.15 U2.38
CH4_RF24: J4.1 U2.37 | length 14.1
  Top Side w0.3: J4.1 22.5,47.5 24.332,49.332 27.732,49.332 30.25,51.85 U2.37
CSN_RF24: U1.4 U2.23 | length 23.3
  Top Side w0.3: U1.4 6.75,66.729 6.75,64.869 10.869,60.75 U2.23
D_N: H1.2 R5.1 TP1.1 | length 20.1
  Top Side w0.381: R5.1 46.2,58.2 46.2,58.268 46.702,58.769 50.674,58.769 54.75,62.845 ; TP1.1 54.75,62.845 ; H1.2 59.792,63.608 55.512,63.608 54.75,62.845
D_P: H1.3 R4.1 TP2.1 | length 19.2
  Top Side w0.381: R4.1 46.2,59.7 46.496,59.404 50.411,59.404 54.753,63.747 ; TP2.1 54.75,63.75 54.753,63.747 ; H1.3 59.792,64.243 55.249,64.243 54.753,63.747
GND: C1.1 C2.1 C3.1 C4.2 C5.1 C6.2 C7.1 C9.1 C10.2 C11.1 C12.2 C13.1 C14.2 C15.1 C17.1 C18.1 C19.1 C20.1 C21.1 C22.1 C23.1 C25.1 C26.1 D3.1 H1.5 H1.6 H2.5 H2.6 H3.1 H3.3 P3.3 P4.9 P4.10 P5.2 P6.3 P7.3 Q1.1 R2.1 R6.1 R7.1 R22.1 S1.2 S2.2 TP14.1 TP15.1 TP16.1 TP17.1 U1.2 U2.2 U2.17 U2.46 U2.60 U3.13 U3.17 U4.2 U4.5 U5.2 U6.7 U6.EPAD U7.2 | length 59
  Top Side w0.3: v1(3.15,47) C26.1 3.4,48.5 U7.2 ; U1.2 4.2,66.736 C2.1 C2.1@4.3,64.5 ; v1(8.65,46.75) C25.1 ; U6.7 18.365,24.865 v4(19,25.5) ; S1.2 S1.2@17.2,50.25 ; v1(21.25,33.5) C20.1 21.5,35.1 U5.2 ; C21.1 23.525,26.575 24.525,26.575 v1(25.6,25.5) ; U2.17 27.643,63.75 27.842,63.949 v2(27.951,63.949) ; v1(26.7,33.5) 26.75,33.55 C19.1 ; v2(34.2,64) 34.218,64.018 34.818,64.018 35.25,64.45 U2.2 ; v1(34.65,69.35) 34.65,67.15 35.275,66.525 35.275,66.214 U2.2@35.25,66.189 ; U2.46 34.75,55.617 34.908,55.775 v2@35,55.775 ; v2(36.1,62) 36.208,62 36.449,61.76 37.515,61.76 U2.60 ; v1(37,19.2) 39.1,19.2 R7.1 ; v1(38.109,23.409) 38.109,23.22 38.5,22.829 C14.2 ; TP17.1@38.9,32.2 TP17.1 39.4,32.7 v1(42,32.7) ; C17.1 v2(39.1,66.4) ; v1(40.6,22.9) C7.1 42.6,22.7 42.6,22 42.9,21.7 42.95,21.65 U3.13 ; R6.1 v1(44.2,63.4) ; C15.1 v1(47.827,67.8) ; C18.1 v1(49,64.25) ; v1(57.9,59.596) C1.1 ; H1.5 H1.6@59.8,66.75 ; H1.6@62.5,60.75 62.5,63.25 H1.6@62.5,65.25
  Bottom Side w0.3: v2(27.951,63.949) 28.449,63.949 C5.1 ; v2(28.625,57.675) 28.625,58.725 C10.2 ; v2(30.2,60.775) 30.2,61.8 C6.2 ; v2(32.875,60.25) 32.875,61.306 C4.2 ; v2(34.2,64) 34.2,63.363 34.3,63.263 C13.1 ; v2(34.9,55.875) 34.9,56.45 35.15,56.7 C9.1@35.2,56.7 ; C12.2 35.3,57.9 C9.1@35.3,56.7 ; C11.1 35.4,61.8 35.6,62 v2(36.1,62)
  other v1: 60.37,2.286 46.1,2.4 52.4,2.4 56.6,2.5 30.9,3.9 27.7,4 46.154,5.326 56.7,6.8 60.454,6.826 60.514,11.13 30.6,21.4 30.5,26.4 50.8,32.9 50.8,36.6 11.8,54.6 58.7,54.8 10.5,57.6 4.163,59.497 1.527,59.873 7.514,60.43 51.1,69.2 58.2,70 27.3,78 38.747,78.173 35,78.9 27.6,82.3 31.6,82.3
  other v3: 43.275,17.8
HBR1_BAC: U2.48 U3.15 | length 39.3
  Top Side w0.3: U2.48 35.75,50.5 43,43.25 43,31 39.75,27.75 39.75,22.619 40.459,21.909 40.991,21.909 41.65,21.25 U3.15
HBR1_FOR: U2.15 U3.16 | length 56.1
  Top Side w0.3: U2.15 28.763,65.537 28.763,67.663 v2(28.775,67.675) ; v1(32.75,49.75) 32.75,48 35.75,45 35.75,27.681 39.3,24.131 39.3,22.3 U3.16
  Bottom Side w0.3: v2(28.775,67.675) 26.55,65.45 26.55,57.1 32.75,50.9 v1(32.75,49.75)
HBR2_BAC: U2.47 U3.10 | length 40.8
  Top Side w0.3: v2(34.9,52) 34.9,53.09 35.25,53.44 U2.47 ; v2(36.6,52) 36.6,51.014 44.1,43.514 44.1,28.1 46.9,25.3 46.9,23.25 44.9,21.25 U3.10
  Bottom Side w0.3: v2(34.9,52) v2(36.6,52)
HBR2_FOR: U2.4 U3.9 | length 54.9
  Top Side w0.3: v2(34.213,66.732) 34.24,66.705 34.24,65.535 U2.4 ; v2(38.5,52) 38.5,50.25 45.25,43.5 45.25,28.45 48,25.7 48,22.5 47,21.5 46.176,20.676 45.55,20.676 U3.9
  Bottom Side w0.3: v2(34.213,66.732) 34.993,66.732 37,64.725 37,55.875 38.5,54.375 v2(38.5,52)
HBR_SLEEP: U2.32 U3.1 | length 49.4
  Top Side w0.3: v2(26.475,55.5) U2.32 ; v1(32.8,45.8) 34.6,44 34.6,18.8 38.4,15 U3.1
  Bottom Side w0.3: v2(26.475,55.5) 26.475,51.125 31.8,45.8 v1(32.8,45.8)
IRQ_RF24: U1.8 U2.20 | length 17.4
  Top Side w0.3: U1.8 11.814,65.217 14.781,62.25 U2.20
LED_STRIP: U2.28 U4.4 | length 63.9
  Top Side w0.2: v2(23.85,58.275) v2@23.875,58.25
  Top Side w0.3: v2@23.875,58.25 U2.28 ; v1(55.331,28.269) 55.341,28.259 55.341,25.259 U4.4
  Bottom Side w0.3: v2(23.85,58.275) 23.85,33.9 27.85,29.9 53.7,29.9 v1(55.331,28.269)
LOW_BAT_LED: R16.1 U2.44 | length 12.4
  Top Side w0.3: U2.44 33.75,51.5 39.6,45.65 39.6,44.9 39.8,44.7 R16.1
MISO: U1.7 U2.27 | length 22.1
  Top Side w0.3: U1.7 10.543,65.25 12.393,63.4 v1(12.5,63.4) ; v1(15.259,58.885) 15.374,59 23.974,59 24.224,58.75 U2.27
  Bottom Side w0.3: v1(12.5,63.4) 12.5,60.2 13.815,58.885 v1(15.259,58.885)
MOSI: U1.6 U2.22 | length 21.2
  Top Side w0.3: U1.6 9.271,65.079 v1(10.8,63.55) ; v1(11.3,61.8) 11.85,61.25 U2.22
  Bottom Side w0.3: v1(10.8,63.55) 10.8,63.489 11.3,62.989 v1(11.3,61.8)
NetC2_2: C2.2 L1.1 U1.1 | length 4.7
  Top Side w0.5: L1.1 2.5,64.3 C2.2 2.914,64.714 U1.1
NetC4_1: C4.1 C6.1 C10.1 C12.1 L2.2 U2.8 U2.12 U2.24 U2.54 | length 30.1
  Top Side w0.2: U2.24 U2.24@26.485,60.24 ; v2@27.74,60.24 v2@27.755,60.255 ; v2(30.238,64.338) v2@30.25,64.35 ; v2(36,58.8) 36.1,58.7 41.192,58.7 41.321,58.829 v2(41.408,58.829)
  Top Side w0.3: U2.24@26.485,60.24 v2@27.74,60.24 ; v2@30.25,64.35 U2.12 ; U2.8 32.25,64.49 32.865,63.875 v2(32.95,63.875) ; v2(41.9,61.2) 42.3,61.6 L2.2
  Bottom Side w0.3: v2(27.855,60.255) 27.911,60.2 C10.1 28.7,60.858 29.5,61.658 29.5,62.5 29.95,62.95 29.95,63 30.2,63.25 C6.1 30.238,63.262 30.238,63.362 v2(30.238,64.338) 32.487,64.338 v2(32.95,63.875) 32.919,63.844 C4.1 33.12,62.55 33.605,62.55 34.125,62.03 34.125,59.75 34.476,59.399 C12.1 ; C12.1 35.8,58.8 v2(36,58.8) ; v2(41.408,58.829) 41.408,60.708 v2(41.9,61.2)
NetC7_2: C7.2 C8.2 R3.2 U3.12 | length 5.8
  Top Side w0.2: U3.12 43.6,21.707
  Top Side w0.5: 43.6,21.707 43.7,21.807 43.7,22.6 C7.2 R3.2 44.05,24.7 C8.2
NetC8_1: C8.1 U3.11 | length 3.2
  Top Side w0.3: U3.11 44.25,21.25 45.5,22.5 C8.1
NetC14_1: C14.1 U3.14 | length 4.7
  Top Side w0.3: C14.1@38.9,20.7 39.6,20.7 40.8,19.5 41.85,19.5 42.3,19.95 U3.14
NetC15_2: C15.2 U2.62 Y1.3 | length 10.7
  Top Side w0.3: U2.62 v2(39.05,62.75) ; v2(43.9,66) Y1.3 C15.2
  Bottom Side w0.3: v2(39.05,62.75) 40.65,62.75 v2(43.9,66)
NetC16_1: C16.1 R6.2 | length 2.8
  Top Side w0.3: C16.1 41.2,66.1 R6.2 R6.2@42,65.7
NetC16_2: C16.2 C17.2 L2.1 U2.64 | length 5.2
  Top Side w0.3: U2.64 39.05,63.75 C17.2 C16.2 L2.1
NetC18_2: C18.2 U2.61 Y1.1 | length 15.2
  Top Side w0.3: U2.61 37.55,62.225 38.594,62.225 39.019,61.8 v2(39.059,61.8) ; v2(47.5,64.075) Y1.1 47.75,61.35 C18.2
  Bottom Side w0.3: v2(39.059,61.8) 45.225,61.8 v2(47.5,64.075)
NetC19_2: C19.2 R18.2 TP10.1 U5.5 | length 8.1
  Top Side w0.3: U5.5 26.7,36.05 C19.2 ; R18.2 27.25,38 26.75,37.5 C19.2 ; TP10.1@29.027,35.473 TP10.1 27.5,35.25 C19.2
NetC21_2: C21.2 R20.1 R23.1 U6.2 U6.3 | length 6.5
  Top Side w0.3: U6.2 U6.3
  Top Side w0.5: U6.2 23.415,24.865 C21.2
  Top Side w0.6: C21.2 R20.1 24.9,23.45 R23.1
NetC22_2: C22.2 C23.2 L3.2 R21.2 U6.5
NetC24_1: C24.1 U6.1 | length 3.1
  Top Side w0.6: C24.1 19.7,23.3 19.995,23.595 U6.1
NetC24_2: C24.2 D3.2 L3.1 U6.8
NetC25_2: C25.2 R24.2 TP13.1 U7.5 | length 5.5
  Top Side w0.3: U7.5 8.6,49.45 C25.2 ; R24.2 8.65,50.55 C25.2 ; TP13.1 10.4,48.5 9.4,49.5 C25.2
NetD1_2: D1.2 D2.2 R17.2 | length 10.5
  Top Side w0.5: D2.2 D1.2@12.45,40.9 ; D1.2 R17.2
  Top Side w0.6: D1.2@12.45,40.9 D1.2
NetDL1_1: DL1.1 R8.2 | length 1.8
  Top Side w0.3: DL1.1 R8.2
NetDL2_1: DL2.1 R9.2 | length 1.8
  Top Side w0.3: R9.2 38.45,43.15 DL2.1
NetDL3_1: DL3.1 R16.2 | length 1.8
  Top Side w0.3: DL3.1 R16.2
NetF1_1: F1.1 H3.2
NetF1_2: F1.2 Q1.3
NetP1_1: P1.1 U3.2 | length 6.8
  Top Side w0.3: 41.65,13.9 U3.2
  Top Side w0.5: P1.1 39.73,11.089 41.65,13.009 41.65,13.9
NetP1_2: P1.2 U3.4 | length 6.8
  Top Side w0.3: 42.95,13.85 U3.4
  Top Side w0.5: P1.2 41,10.762 42.95,12.712 42.95,13.85
NetP2_1: P2.1 U3.7 | length 6.5
  Top Side w0.3: 44.9,13.8 U3.7
  Top Side w0.5: 44.9,13.8 44.9,13.6 46,12.5 P2.1
NetP2_2: P2.2 U3.5 | length 6.5
  Top Side w0.3: 43.6,13.8 U3.5
  Top Side w0.5: 43.6,13.8 43.6,12.883 44.73,11.753 P2.2
NetP4_3: P4.3 R10.2 | length 3.5
  Top Side w0.3: R10.2 52.81,78.85 P4.3
NetP4_4: P4.4 R11.1 | length 6.3
  Top Side w0.3: P4.4 54.415,82.705 54.415,81.65 55.32,80.745 55.32,79.745 54.27,78.695 54.27,77.5 R11.1
NetP4_5: P4.5 R12.2 | length 3.3
  Top Side w0.3: R12.2 55.81,79.31 P4.5
NetP4_6: P4.6 R13.1 | length 6.1
  Top Side w0.3: P4.6 56.955,82.705 56.955,81.65 57.86,80.745 57.86,79.83 57.21,79.18 R13.1
NetP4_7: P4.7 R14.2 | length 3.1
  Top Side w0.3: R14.2 58.75,78.1 59.35,78.7 P4.7
NetP4_8: P4.8 R15.1 | length 5.8
  Top Side w0.3: P4.8 60.4,81.8 60.4,77.65 R15.1
NetP6_2: P6.2 TP8.1 U4.3 | length 6.6
  Top Side w0.3: U4.3 TP8.1@58.9,22.85
  Top Side w0.5: P6.2 54.75,21.45 55.35,22.05 U4.3
NetR4_2: R4.2 U2.57 | length 6.2
  Top Side w0.2: U2.57 42.15,60.25 42.7,59.7 R4.2
NetR5_2: R5.2 U2.56 | length 6.7
  Top Side w0.2: U2.56 38.189,59.75 38.239,59.8 41.3,59.8 42.9,58.2 R5.2
NetR7_2: R7.2 U3.3 U3.6 | length 7
  Top Side w0.3: R7.2 41.75,16.2 U3.3@42.3,15.65 ; U3.3 U3.3@42.3,15.65 ; U3.6 44.25,15.65 43.8,16.1 42.75,16.1 U3.3@42.3,15.65
NetR23_2: R23.2 U6.4 | length 9.3
  Top Side w0.3: U6.4 21.316,27.4 26.1,27.4 27,26.5 27,24.15 26.45,23.6 R23.2
NetTP7_1: TP7.1 U2.55 | length 13.3
  Top Side w0.2: U2.55 v2(39.5,59.25) ; TP7.1@43.975,51.25 TP7.1
  Top Side w0.3: v1(41.75,51.25) TP7.1@43.975,51.25
  Bottom Side w0.3: v2(39.5,59.25) 41.75,57 v1(41.75,51.25)
nRST: H2.1 S1.1 TP5.1 U2.39 | length 53.9
  Top Side w0.3: S1.1 18.15,54.85 20.3,52.7 24.524,52.7 28.124,56.3 v2(28.6,56.3) ; U2.39 31.26,54.485 31.26,55.975 v2(31.29,56.005) 31.785,56.5 35.275,56.5 36.675,55.1 49.94,55.1 H2.1 53.83,48.08 53.5,47.75 TP5.1
  Bottom Side w0.3: v2(28.6,56.3) 30.914,56.3 31.209,56.005 v2(31.29,56.005)
PA9: R14.1 U2.30 | length 58.4
  Top Side w0.2: v2(21.1,57.2) 21.14,57.24 26.465,57.24 U2.30
  Top Side w0.3: v1(35.25,72.775) 35.275,72.75 56.25,72.75 58.75,75.25 R14.1
  Bottom Side w0.3: v2(21.1,57.2) 21.1,69.3 24.575,72.775 v1(35.25,72.775)
PA10: R15.2 U2.29 | length 56.4
  Top Side w0.2: v2(22.3,58.1) 22.8,57.6 25.075,57.6 25.25,57.775 25.786,57.775 25.811,57.75 U2.29
  Top Side w0.3: v1(37.19,71.5) 56.5,71.5 60.25,75.25 R15.2
  Bottom Side w0.3: v2(22.3,58.1) 22.3,68.55 25.25,71.5 v1(37.19,71.5)
PA19: R13.2 U2.13 | length 34.8
  Top Side w0.3: U2.13 29.75,66.745 30.15,67.145 v2(30.15,67.8) ; v2(31.5,69.7) 31.478,69.722 31.478,71.178 34.1,73.8 55.7,73.8 57.21,75.31 R13.2
  Bottom Side w0.3: v2(30.15,67.8) 30.15,68.925 30.925,69.7 v2(31.5,69.7)
PA20: R12.1 U2.16 | length 36.3
  Top Side w0.3: U2.16 28.25,67 27.95,67.3 27.95,71.25 33.4,76.7 54.985,76.7 55.46,76.225 55.46,76.21 55.71,75.96 R12.1
PA21: R11.2 U2.11 | length 31.8
  Top Side w0.3: U2.11 30.75,71.55 33.9,74.7 53.7,74.7 54.3,75.3 54.3,75.95 R11.2
PA22: R10.1 U2.14 | length 31.2
  Top Side w0.3: U2.14 29.25,66.972 29.5,67.222 29.5,71.4 34.01,75.91 R10.1
SCK: U1.5 U2.21 | length 21.7
  Top Side w0.3: U1.5 8,64.75 10.15,62.6 13.795,62.6 14.645,61.75 U2.21
SERVO_1: P3.1 U2.25 | length 68.9
  Top Side w0.3: v2(24.581,60) 24.662,60 24.912,59.75 U2.25 ; v1(45.5,46.25) 46.154,45.596 47.25,44.5 47.25,29.75 50.1,26.9 50.1,18.4 52.1,16.4 P3.1
  Bottom Side w0.3: v2(24.581,60) 24.581,58.517 24.6,58.499 24.6,51.7 31.8,44.5 42,44.5 43.75,46.25 v1(45.5,46.25)
SERVO_2: P7.1 U2.9 | length 69.6
  Top Side w0.3: U2.9 v2(31.75,67.25) ; v2(39.7,53.1) 39.7,50.136 46.25,43.586 46.25,29 48.9,26.35 48.9,15.9 52.05,12.75 P7.1
  Bottom Side w0.3: v2(31.75,67.25) 32.25,67.75 36.574,67.75 38.25,66.074 38.25,56.5 39.75,55 39.75,53.15 v2(39.7,53.1)
SLEEP_BTN: S2.1 U2.31 | length 6
  Top Side w0.3: S2.1 21.5,55.3 22.95,56.75 U2.31
STATUS0_LED: R8.1 U2.36 | length 14.3
  Top Side w0.3: v2(29.1,52.1) 29.75,52.75 U2.36 ; v1(34.25,48.75) 37.05,45.95 R8.1
  Bottom Side w0.3: v2(29.1,52.1) 32.45,48.75 v1(34.25,48.75)
STATUS1_LED: R9.1 U2.43 | length 11.9
  Top Side w0.3: U2.43 33.25,51.05 38.4,45.9 R9.1
SWCLK: H2.2 TP3.1 U2.53 | length 44.1
  Top Side w0.3: U2.53 41.25,58.25 42.25,57.25 52.5,57.25 59.5,50.25 H2.2 60.75,46.83 60.75,42.5 60,41.75 56.659,41.75 55.409,40.5 TP3.1@51,40.5
SWDIO: H2.4 TP4.1 U2.51 | length 38.3
  Top Side w0.3: U2.51 39.301,57.25 39.851,56.7 51.4,56.7 58.25,49.85 58.25,46.79 H2.4 58.21,44.25 53.5,44.25 53.25,44 TP4.1@50.5,44
USB_DETECT: R1.1 R2.2 U2.35 | length 36.2
  Top Side w0.3: U2.35 29.25,55.55 30.7,57 35.5,57 36.7,55.8 50.7,55.8 v1(51.5,55) ; v1(54.7,56.6) 54.7,56.627 55.323,57.25 R1.1 R2.2
  Bottom Side w0.3: v1(51.5,55) 53.1,55 v1(54.7,56.6)
VBATT: Q1.2 R3.1 R19.2 R20.2 TP9.1 | length 2.4
  Top Side w0.5: v1(35.375,3.475) 35.375,5.775 TP9.1
  Top Side w0.6: R20.2 R20.2@23.55,21.9
  other v1: 24.473,9.204 22.7,9.331 23.4,20.6 25.2,20.6 42.5,26.75
VBATT_MEAS: R19.1 R22.2 U2.10 | length 72.5
  Top Side w0.2: v2(27.885,51.4) 27.885,52.385 27.875,52.395 27.875,55.28 28.17,55.575 28.653,55.575 31.25,58.172 U2.10
  Top Side w0.3: R19.1 25.051,6.204 25.227,6.38 25.227,7.385 25.403,7.561 25.961,7.561 R22.2 31.9,7.7 35,10.8 35,17 33.5,18.5 33.5,43.25 31.4,45.35 v1(31.4,47.9)
  Bottom Side w0.3: v2(27.885,51.4) 27.893,51.4 31.393,47.9 v1(31.4,47.9)
VBUS: C1.2 D1.1 H1.1 R1.2 | length 75.4
  Top Side w0.3: 58.8,62.95 H1.1 60.275,62.95 60.75,62.475 R1.2
  Top Side w0.5: C1.2@57.9,62.55 C1.2@58.15,62.8 ; C1.2 C1.2@58.1,62.95
  Top Side w0.6: D1.1@13.85,33.1 12.95,34 D1.1 12.576,33.924 12.576,32.424 13.75,31.25 v1(32,31.25) ; v1(55.75,62) 56.5,62.75 C1.2 ; C1.2@58.1,62.95 58.8,62.95
  Bottom Side w0.6: v1(32,31.25) 35.25,31.25 55.75,51.75 v1(55.75,62)
pads on no net: H1.4 H2.3 H2.9 H2.10 U2.3 U2.5 U2.6 U2.19 U2.33 U2.34 U2.40 U2.49 U2.50 U2.59 U2.63 U3.8 U5.4 U6.6 U7.4 Y1.2 Y1.4

## Polygon pours and split planes (outlines as drawn)
GND on Top Side "NONET_L01_P023" (solid, remove dead copper, shelved, pour order 23): 0,0 0,85 64,85 64,0
3V3 on Top Side "NONET_L01_P022" (solid, shelved, pour order 22): 36.25,40.75 40.5,40.75 40.5,42.8 42.5,42.8 42.5,38.75 36.25,38.75
VBATT on Top Side "NONET_L01_P021" (solid, shelved, pour order 21): 43.5,23.75 41.5,23.75 41.5,27.75 43.5,27.75
NetF1_2 on Top Side "NONET_L01_P019" (solid, shelved, pour order 19): 19.204,9.596 21.2,7.6 21.2,5.696 19.5,5.696 19.5,7.1 16.404,7.1 16.404,9.596
NetC22_2 on Top Side "NONET_L01_P014" (solid, shelved, pour order 14): 12.9,26.5 17.8,26.5 17.8,28.2 12.9,28.2 11.5,29.6 5.1,29.6 3.5,28 3.5,14.5 11.5,14.5 11.5,16.3 6.6,16.3 6.6,22.2 9.6,25.2 11.6,25.2
NetF1_1 on Top Side "NONET_L01_P020" (solid, shelved, pour order 20): 19.3,4 19.3,6.5 15.6,6.5 15.6,8.64 14.36,8.64 12.6,8.64 12.6,4 15.5,4
VBATT on Top Side "NONET_L01_P018" (solid, shelved, pour order 18): 21.673,6.904 25.473,6.904 25.473,10.304 21.673,10.304
5V_BUCK on Top Side "NONET_L01_P017" (solid, shelved, pour order 17): 27.5,17.5 27.5,12 34.5,12 34.5,17.5
5V_BUCK on Top Side "NONET_L01_P016" (solid, shelved, pour order 16): 8.5,36.6 8.5,30 1.5,30 1.5,36.6
5V_BUCK on Top Side "NONET_L01_P015" (solid, shelved, pour order 15): 13.5,14.3 13.5,12.1 9.5,12.1 9.5,14.3
NetC24_2 on Top Side "NONET_L01_P013" (solid, shelved, pour order 13): 6.9,21.9 9.1,24.1 12.5,24.1 19,24.1 19,13 14.1,13 14.1,16.5 6.9,16.5
VBATT on Top Side "NONET_L01_P012" (solid, shelved, pour order 12): 25.1,22.8 26.2,21.7 26.2,19.7 22.5,19.7 22.5,22.8
GND on Bottom Side "NONET_L04_P024" (solid, remove dead copper, shelved, pour order 24): 0,0 0,85 64,85 64,0
GND on Ground Plane (split plane): 63.49,0.51 0.51,0.51 0.51,69 19.5,69 25,78.5 25,84.49 63.49,84.49
VBATT on Power Plane (split plane): 44.893,26.893 44.924,26.869 44.961,26.854 45,26.849 63.49,26.849 63.49,0.51 0.51,0.51 0.51,10.849 57.9,10.849 57.939,10.854 57.976,10.869 58.007,10.893 58.031,10.924 58.046,10.961 58.051,11 58.051,21.5 58.046,21.539 58.031,21.576 58.007,21.607 57.976,21.631 57.939,21.646 57.9,21.651 49,21.651 48.961,21.646 48.924,21.631 48.893,21.607 46.437,19.151 19.651,19.151 19.651,28.849 42.937,28.849
3V3 on Power Plane (split plane): 63.49,27.151 45.063,27.151 43.107,29.107 43.076,29.131 43.061,29.137 43.039,29.146 43,29.151 19.651,29.151 19.651,35.271 23.5,35.271 23.55,35.28 23.592,35.308 23.62,35.35 23.629,35.4 23.629,40 23.62,40.05 23.592,40.092 23.55,40.12 23.5,40.129 17.629,40.129 17.629,50 17.629,52.5 17.62,52.55 17.592,52.592 17.55,52.62 17.5,52.629 0.51,52.629 0.51,69 19.5,69 25,78.5 25,84.49 63.49,84.49